# Altium PCB PCB1.PcbDoc (part 3 of 3)
Units mil, origin at the board's own origin, x right, y up, seen from the top; angles counter-clockwise.
Board outline 3550 x 3015 mil, 5 copper layers (Top Layer, GND, Layer 1, Layer 2, Bottom Layer), stack 19.334 mil thick; 291 components, 192 nets, 917 pads, 203 vias.
Unrouted connection lines stored in the file: 51.
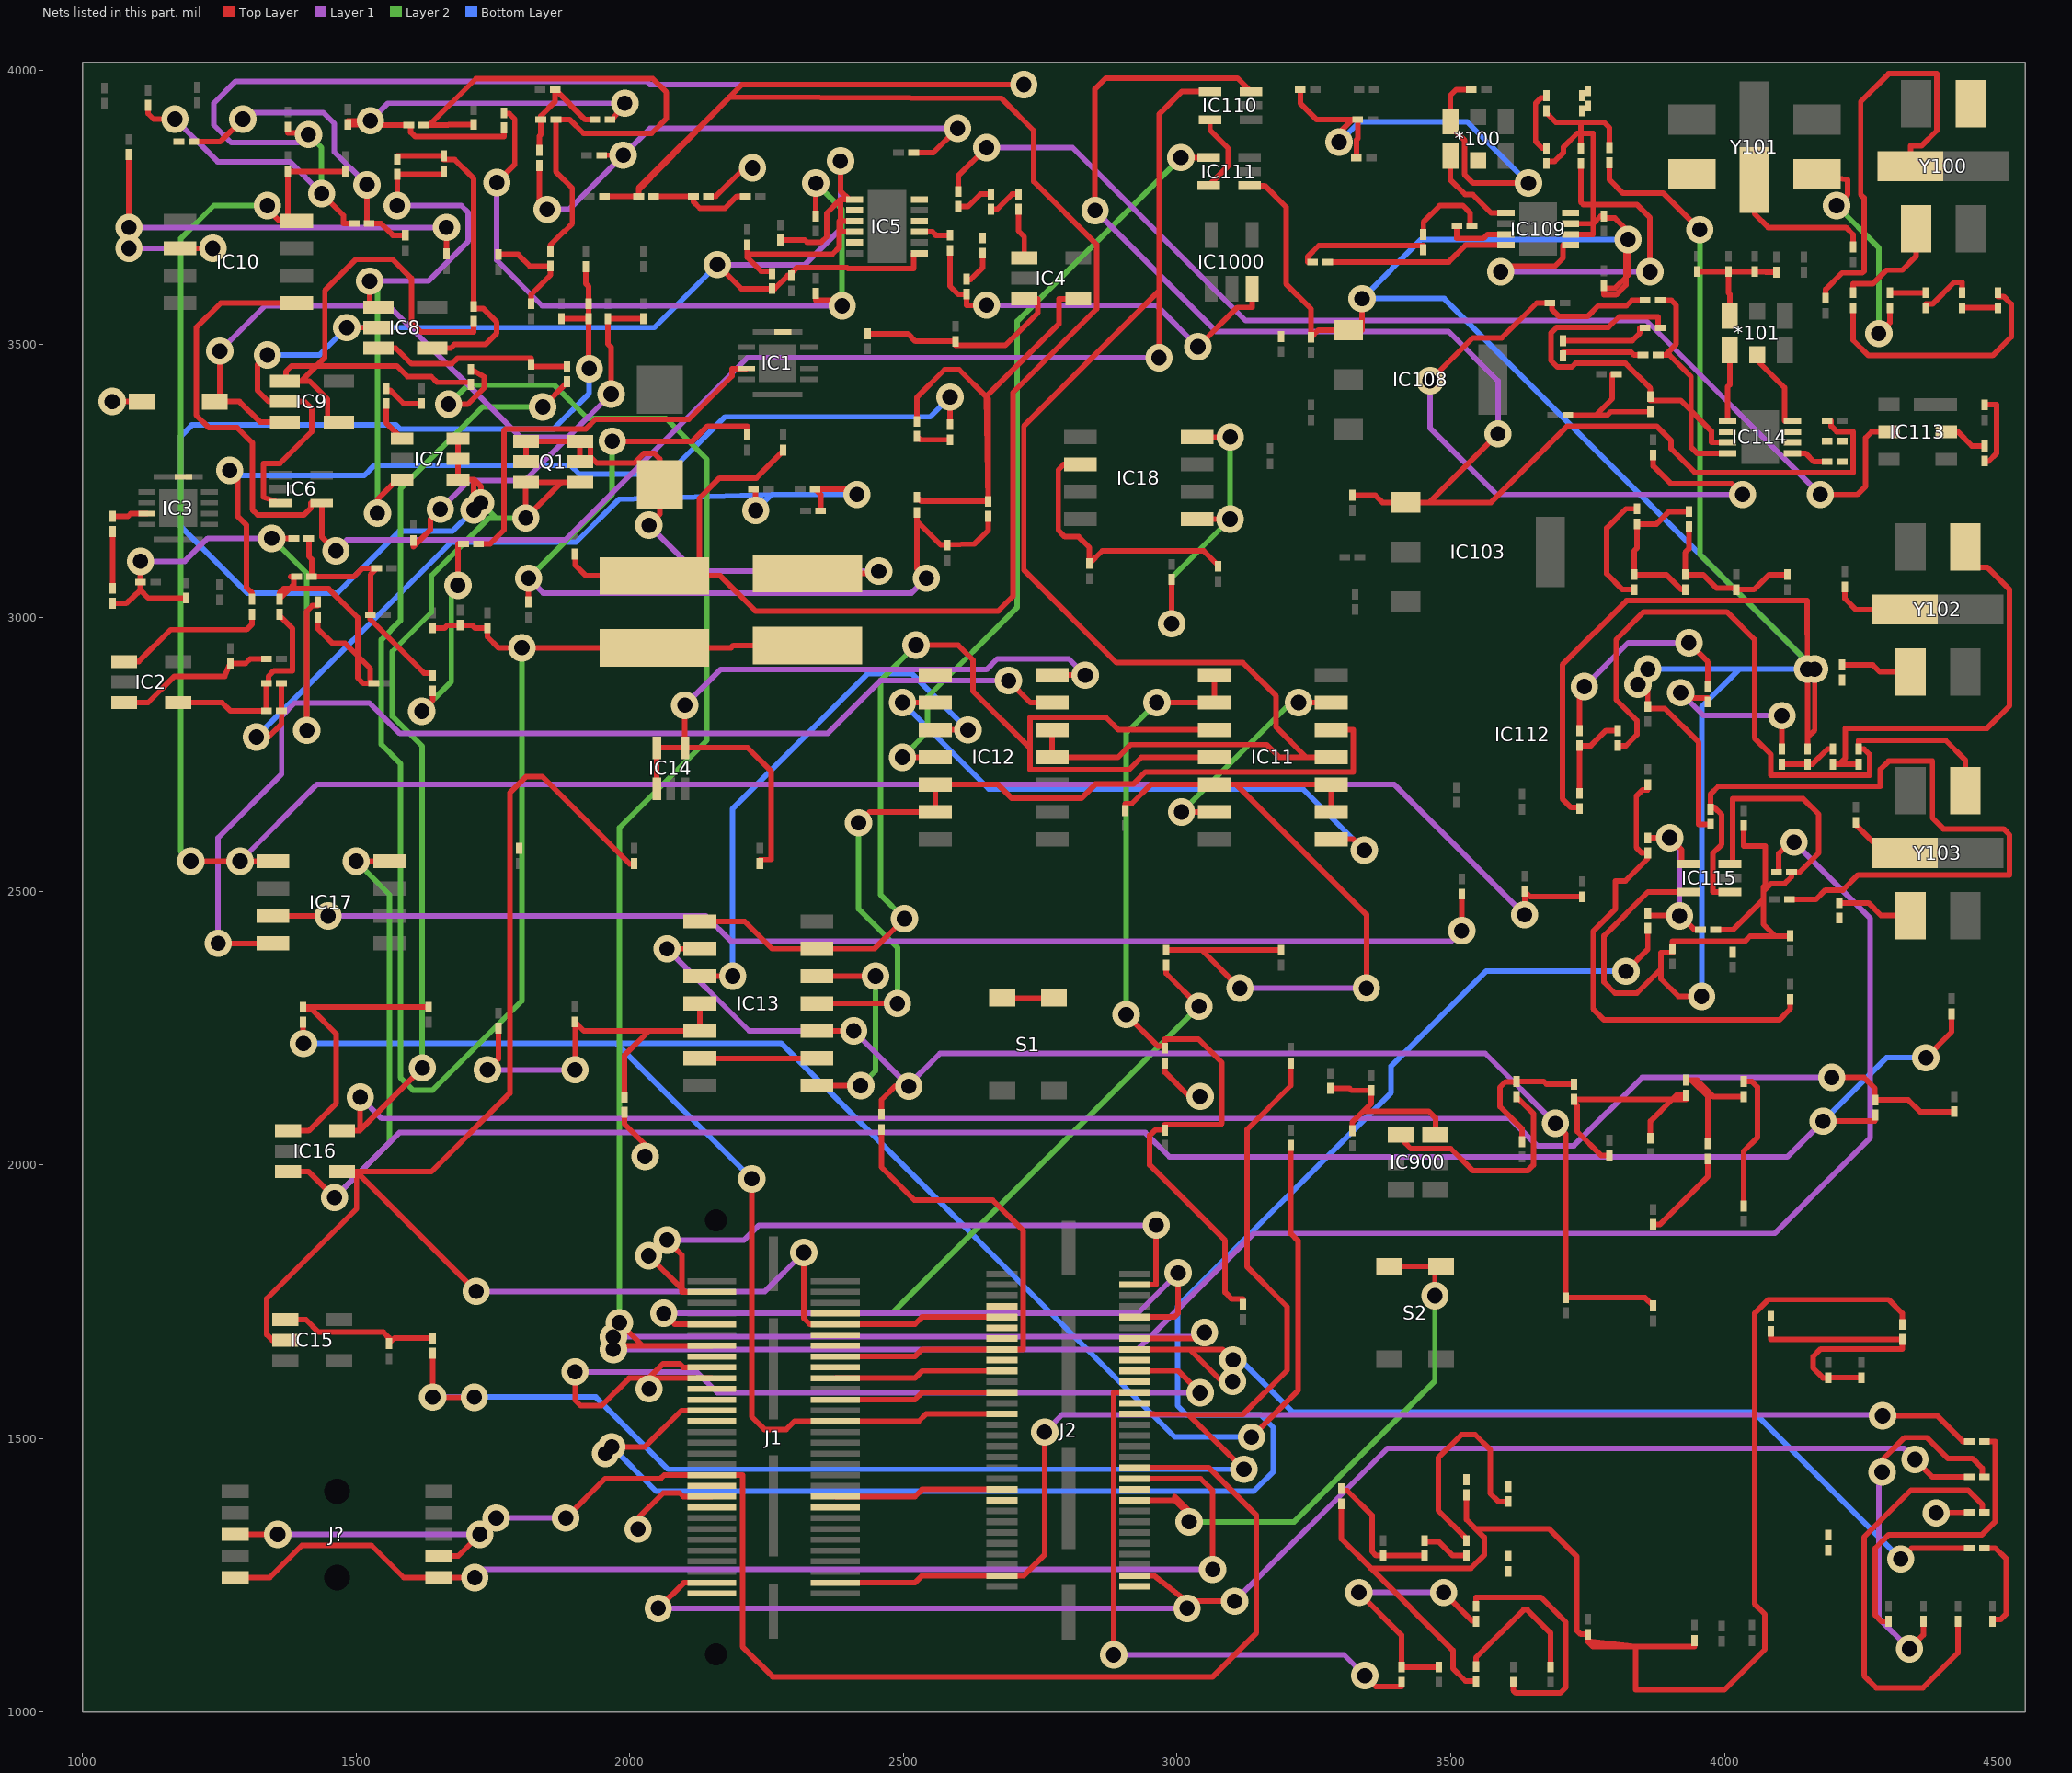
[diagram p5: the nets of this part, all layers, seen from the top]

## Via types
v1: diameter 50, hole 28, Top Layer to Bottom Layer, 203 vias

## Nets (pads, with @x,y where several pads share a name; then routed paths per layer and width w, separated by ;. In a path a pad name is that pad's centre, name@x,y a point inside that pad or via, vN(x,y) a via of type N, cw(c..) or ccw(c..) an arc to the next point about the centre after c; other vN are vias at no path point) (continued)
3.0V_1: C144.2 C152.2 C158.2 C161.2 C164.2 C171.2 C174.1 IC108.1 IC109.7 IC111.1 IC112.7 IC112.8 IC115.5 L123.1 L126.2 L131.1 R141.1 | length 7350.2
  Top Layer w10: IC111.1@3132.4,3789.41 3160,3789.41 3199,3750.41 3199,3610 3245,3564 C144.2@3245,3512.56 3257.99,3525.55 IC108.1@3313.11,3525.55 3338,3525.55 v1(3338,3583) ; IC109.7@3719.06,3719.84 3760,3719.84 3773.94,3733.78 3776.22,3733.78 C152.2@3780,3730 ; L131.1@3735,2651.22 3735,2653 3720,2653 3704,2669 3704,2914 3821.22,3031.22 4151.45,3031.22 4151.55,2906 L126.2@4151.67,2760 4151.67,2781 ; C158.2@3780,3606.22 C158.2@3780,3602 ; C152.2@3780,3733.78 C152.2@3780,3730 ; L123.1@3790,3831.22 3790,3800 3814,3776 3888,3776 v1(3955,3709) ; v1(3824,3691) 3824,3626 3820,3622 ; v1(3842,2878.12) 3860,2860.12 ; v1(3860,2906) 3860,2860.12 ; IC115.5@3935.2,2498.82 3860.1,2498.82 3780,2418.71 3780,2334 3800,2314 3840,2314 3884,2358 ; v1(3958.38,2308) 3916,2308 3884,2340 3884,2358 ; R141.1@3975,2622.44 3953,2622.44 3953,2772 3891,2834 3860,2834 C161.2@3860,2837.56 3860,2860.12 ; C174.1@4035,2620 4035,2583 4075,2583 4075,2512 4071,2508 4071,2440 4093,2418 ; C171.2@4120,2418.78 4120,2418 4093,2418 ; v1(4151.67,2906) 4151.67,2781 ; v1(4165,2906) 4165,2794.33 4151.67,2781 ; C158.2@3780,3602 3800,3602 3820,3622 ; C158.2@3780,3602 3780,3589.82 3801.82,3589.82 3820,3608 3820,3622 ; C152.2@3780,3730 3800,3730 3820,3710 3820,3622 ; 3884,2358 3884,2388 3905,2388 C164.2@3905,2395 3905,2409 4038,2409 4047,2418 4093,2418
  Layer 2 w10: v1(3955,3709) 3955,3116 v1(4165,2906)
  Bottom Layer w10: v1(3824,3691) 3446,3691 v1(3338,3583) 3488,3583 v1(4165,2906) ; v1(3860,2906) 4027,2906 ; v1(3958.38,2308) 3958.38,2837.38 4027,2906 ; v1(4151.67,2906) 4027,2906
3.0V_2: C142.2 C169.2 IC103.1 IC110.3 IC114.2 IC114.7 | length 2823.5
  Top Layer w10: v1(2850,3744) 2850,3966 2870,3986 3110.18,3986 IC110.3@3135,3961.18 ; C142.2@3320,3223.78 3362,3223.78 3375.23,3210.55 IC103.1@3418.11,3210.55 3460.76,3210.55 ; v1(3586.2,3336) 3460.76,3210.55 ; C169.2@4187.44,3360 4195,3360 4195,3350 4205,3340 4235,3340 4235,3265 3946.48,3265 3902.79,3308.69 3902.79,3323.21 3876,3350 3713,3350 3573.55,3210.55 3460.76,3210.55
  Layer 1 w10: v1(2850,3744) 3071,3523 3495.87,3523 3586.2,3432.67 v1(3586.2,3336)
3.0V_3: C211.1 C213.1 L202.2 R206.1 R208.1 R222.1 | length 2731.6
  Top Layer w10: R208.1@3300,1381.22 3300,1317.08 3354,1263.08 ; R206.1@3528.75,1397.44 3528.75,1352 3545.75,1335 ; R222.1@3546,1056.22 3546,1057 3527,1057 3504,1080 3504,1113.08 3354,1263.08 ; C213.1@3945,1131.22 3945,1120 3838,1120 ; L202.2@4325,1708.78 4325,1729 4300,1754 4080,1754 4055,1729 4055,1198 4074,1179 4074,1115 4000,1041 3838,1041 3838,1120 ; 3354,1263.08 3537.08,1263.08 3561,1287 3561,1319.75 3545.75,1335 ; 3545.75,1335 3680,1335 3730,1285 3730,1150 3737.56,1142.44 C211.1@3750,1142.44 3750,1130 ; 3750,1130 3838,1120 ; 3750,1130 3760,1120 3838,1120
3.0V_log: C59.1 IC12.14 IC14.1 IC14.4 IC14.5 | length 1407.2
  Top Layer w10: IC14.1@2049.41,2687.6 IC14.5@2049.41,2762.4 IC14.4@2100.59,2762.4 ; v1(2100.59,2840) IC14.4@2100.59,2762.4 ; C59.1@2237.76,2550.87 2237.76,2558 2258,2558 2258,2720 2215.6,2762.4 IC14.4@2100.59,2762.4 ; IC12.14@2771.77,2895 v1(2832,2895)
  Layer 1 w10: v1(2100.59,2840) 2165.59,2905 2651.75,2905 2671.75,2925 2802,2925 v1(2832,2895)
-Z_CIC: J1.24 J2.24 J?.4 J?.5 | length 2844.4
  Top Layer w10: J?.5@1278.78,1325 v1(1357,1325) ; J?.4@1651.22,1285.63 1686.63,1285.63 v1(1726,1325) v1(1756,1355) ; v1(1883,1355) 1955,1427 2056.57,1427 2063,1433.43 J1.24@2150,1433.43 2206,1433.43 2206,1120 2261,1065 3065,1065 3145,1145 3145,1360 3058.43,1446.57 J2.24@2922.99,1446.57
  Layer 1 w10: v1(1357,1325) v1(1726,1325) ; v1(1756,1355) v1(1883,1355)
-Z_DEPLOY_SW_1: J1.17 J2.17 S1.1 S1.2 | length 94.5
  Top Layer w10: S1.1@2680.51,2305 S1.2@2775,2305
-Z_DEPLOY_SW_2: J1.18 J2.18 S2.1 S2.2 | length 1083
  Top Layer w10: J2.18@2922.99,1387.52 2995,1387.52 ; v1(3021.54,1348.15) v1@3022,1348.15 ; v1(3022,1348) v1@3022,1348.15 ; S2.1@3387.76,1814.65 S2.2@3471,1814.65 ; v1(3471,1761) S2.2@3471,1814.65 ; S2.2@3482.24,1814.65 S2.2@3471,1814.65 ; 2995,1387.52 3001.48,1387.52 2995.5,1393.5 2995.5,1394.19 3041.54,1348.15 v1@3022,1348.15 ; 2995,1387.52 3022,1360.52 v1@3022,1348.15
  Layer 2 w10: v1(3022,1348) 3214,1348 3471,1605 v1(3471,1761)
-Z_THERMISTOR: J1.22 J2.22 J?.1 J?.2 | length 2136
  Top Layer w10: J?.1@1278.78,1246.26 1342.26,1246.26 1401,1305 1528.26,1305 1587,1246.26 J?.2@1651.22,1246.26 v1(1717,1246.26) ; J2.22@2922.99,1426.89 3043,1426.89 3065,1404.89 v1(3065,1261)
  Layer 1 w10: v1(1717,1246.26) 1731.74,1261 v1(3065,1261)
CMD_H/W_Bit_0: J1.40 J2.40
CMD_H/W_Bit_1: J1.41 J2.41 | length 309.9
  Top Layer w10: J1.41@2375.59,1610.59 2521,1610.59 2534.15,1623.74 J2.41@2680,1623.74
CMD_H/W_Bit_2: J1.42 J2.42 | length 1620.1
  Top Layer w10: v1(1900,1622) 1900,1570.41 1910.41,1560 1948.41,1560 1999,1610.59 J1.42@2150,1610.59 ; J2.42@2922.99,1623.74 3002.26,1623.74 v1(3042,1584)
  Layer 1 w10: v1(1900,1622) 2122,1622 2160,1584 v1(3042,1584)
CMD_H/W_Bit_3: J1.43 J2.43 R30.1 | length 98.9
  Top Layer w10: R30.1@2977.76,2185.87 2977.76,2169.55 3022,2125.31 v1(3042,2125.31)
CMD_H/W_BITS_STROBE: J1.44 J2.44 | length 169
  Top Layer w10: v1(2035.32,1590.91) 2050,1590.91 2035.32,1605.59 2035.32,1610.91 2061.35,1636.94 2091.15,1636.94 2097.82,1630.28 J1.44@2150,1630.28
CMD_SERIAL_DATA: J1.49 J2.49
I2C2_SCL: J1.19 J2.19 | length 309.9
  Top Layer w10: J1.19@2375.59,1394.06 2521,1394.06 2534.15,1407.2 J2.19@2680,1407.2
I2C2_SDA: J1.20 J2.20 | length 176.5
  Top Layer w10: v1(2015.32,1334.69) 2015.32,1354.69 2061.35,1400.72 2091.15,1400.72 2097.82,1394.06 J1.20@2150,1394.06
ICR_RSSI: J1.37 J2.37 | length 309.9
  Top Layer w10: J1.37@2375.59,1571.22 2521,1571.22 2534.15,1584.37 J2.37@2680,1584.37
IF+: IC112.1 R129.1 R130.1 | length 66
  Top Layer w10: R130.1@4434,3566.22 R129.1@4500,3566.22
IF-: IC112.2 R130.2 R131.1 | length 108.6
  Top Layer w10: R131.1@4368,3566.22 4368,3573 4380,3573 4420,3613 4434,3613 R130.2@4434,3593.78
LT: IC12.4 IC111.4 | length 1417.8
  Top Layer w10: v1(2498,2745) IC12.4@2558.23,2745 ; v1(3007,3841) 3007.41,3840.59 IC111.4@3057.6,3840.59
  Layer 2 w10: v1(2498,2745) 2544,2791 2544,2855 2708,3019 2708,3542 v1(3007,3841)
MODEM_CXR_DET: J1.53 J2.53
Net*100_1: *100.1 C140.2 R126.2 R127.2 R128.2 | length 993
  Top Layer w10: R128.2@3225,3965 3225,3940 3255,3910 3320,3910 ; v1(3296,3869) 3296,3886 3320,3910 ; R127.2@3327.44,3840 3327.44,3873 3330,3875.56 R126.2@3330,3910 3320,3910 ; C140.2@3537.44,3965 3510,3965 3499.61,3954.61 *100.1@3499.61,3906.73 3499.61,3898 3525,3872.61 3525,3810 3541,3794 v1(3642,3794)
  Bottom Layer w10: v1(3296,3869) 3333,3906 3530,3906 v1(3642,3794)
Net*100_4: *100.4 IC109.1 | length 170.2
  Top Layer w10: *100.4@3499.61,3843.72 3499.61,3799.92 3526.34,3773.18 3540,3773.18 3573.66,3739.53 IC109.1@3600.94,3739.53
Net*100_5: *100.5 IC109.8
Net*101_1: *101.1 C162.2 R133.2 R134.2 R135.2 | length 227.1
  Top Layer w10: R133.2@3950,3632.44 R134.2@4007.5,3632.44 ; *101.1@4009.61,3551.73 4009.61,3591 4007.5,3593.11 R134.2@4007.5,3632.44 ; C162.2@4095,3631.22 4075.22,3631.22 4074,3632.44 R135.2@4055,3632.44 R134.2@4007.5,3632.44
Net*101_4: *101.4 IC114.1 | length 130.7
  Top Layer w10: IC114.1@4005.94,3359.53 4005.94,3422 4009.61,3425.66 *101.4@4009.61,3488.72
Net*101_5: *101.5 IC114.8 | length 155.7
  Top Layer w10: *101.5@4060,3480.46 4060,3470 4110,3420 4110,3359.53 IC114.8@4124.06,3359.53
NetC1_2: C1.2 L1.1 R1.2 | length 191.7
  Top Layer w10: R1.2@2043.78,3770 L1.1@2116,3770 ; L1.1@2116.22,3770 L1.1@2116,3770 ; C1.2@2211.22,3770 2196,3770 2174,3748 2128,3748 2116,3760 L1.1@2116,3770
NetC2_2: C2.2 C3.2 L4.2 R2.1 R3.1 | length 1615.4
  Top Layer w10: v1(1318,2782) 1340,2782 1364,2806 1364,2830 L4.2@1363.78,2830 R3.1@1363.78,2880 ; R2.1@2226.22,3235 2230,3235 v1(2230,3196) ; C2.2@2348.78,3195 2348.78,3225 C3.2@2338.78,3235 2405,3235 v1(2415,3225)
  Bottom Layer w10: v1(1318,2782) 1674,3138 1902,3138 1980,3216 2229.1,3224.04 2259,3225 ; v1(2230,3196) 2259,3225 ; v1(2415,3225) 2259,3225
NetC4_2: C4.2 C12.2 L3.2 | length 1035
  Top Layer w10: C12.2@1835,3826.22 1835,3760 v1(1849,3746) ; C4.2@1948.78,3845 v1(1988,3845) ; L3.2@2518.78,3850 2555,3850 v1(2599,3894)
  Layer 1 w10: v1(1849,3746) 1889,3746 v1(1988,3845) 2037,3894 v1(2599,3894)
NetC6_2: C6.2 C12.1 L5.1 R6.1 | length 218.4
  Top Layer w10: C12.1@1835,3853.78 1835,3880 1837.44,3882.44 L5.1@1837.44,3910 1837.44,3916.72 1863.78,3943.06 C6.2@1863.78,3965 1918.78,3910 R6.1@1936.22,3910
NetC8_2: C8.2 C13.2 L6.1 L11.1 | length 560.2
  Top Layer w10: C13.2@1360,3033.78 C13.2@1360,3034.34 ; 1380,3075 L6.1@1386,3075 ; L6.1@1391.22,3075 L6.1@1386,3075 ; L11.1@1430,3001.22 1430,2980 1457,2953 1480,2953 1503,2930 ; C8.2@1532.44,2880 C8.2@1526,2880 ; C13.2@1360,3034.34 1378.66,3053 ; C13.2@1360,3034.34 1360,3045 1368,3053 1378.66,3053 ; 1378.66,3053 1450,3053 1503,3000 1503,2930 ; 1378.66,3053 1386,3060.34 L6.1@1386,3075 ; 1503,2930 1503,2890 1513,2880 C8.2@1526,2880 ; 1503,2930 1526,2907 C8.2@1526,2880
NetC9_2: C9.2 C11.2 L6.2 R4.1 R7.1 | length 454.6
  Top Layer w10: R7.1@1413.78,3145 1413.78,3112 1418.78,3107 L6.2@1418.78,3075 1496,3075 1511,3090 R4.1@1537.44,3090 1526.22,3078.78 C9.2@1526.22,3005 1526,3005 1526,2997 1624,2899 1640,2899 C11.2@1640,2893.78
NetC11_1: C11.1 L2.1 | length 389.1
  Top Layer w10: v1(1620,2829) 1640,2849 C11.1@1640,2866.22 ; v1(1686,3059) 1686,3135 L2.1@1696.22,3135
  Layer 2 w10: v1(1620,2829) 1674,2883 1674,3047 v1(1686,3059)
NetC13_1: C13.1 IC2.4 L4.1 R3.2 | length 395.5
  Top Layer w10: IC2.4@1175,2845 1255,2845 1270,2830 L4.1@1336.22,2830 R3.2@1336.22,2880 1340,2880 1340,2893 1350,2903 1384,2903 1384,2980 1360,3004 C13.1@1360,3006.22
NetC15_2: C15.2 L8.1 R8.2 | length 573.1
  Top Layer w10: L8.1@1203.78,3870 1252,3870 v1(1293,3911) ; v1(1520,3791) 1520,3720 R8.2@1523.78,3720 1546,3720 1567.22,3698.78 C15.2@1590,3698.78
  Layer 1 w10: v1(1293,3911) 1305,3923 1440,3923 1460.26,3902.74 1460.26,3850.74 v1(1520,3791)
NetC16_2: C16.2 L10.2 R10.2 | length 187
  Top Layer w10: C16.2@1760,3663.78 1796,3663.78 1817.34,3642.44 L10.2@1855,3642.44 1855,3626 1820,3591 R10.2@1820,3573.78
NetC17_1: C17.1 C20.1 L9.1 R6.2 | length 886.3
  Top Layer w10: v1(1526,3908) 1485,3908 C20.1@1485,3901.22 1540,3901.22 1541.22,3900 L9.1@1596.22,3900 1600,3900 1600,3887 1608.3,3878.7 1770,3878.7 C17.1@1770,3895 ; R6.2@1963.78,3910 1968,3910 v1(1991,3940)
  Layer 1 w10: v1(1526,3908) 1558,3940 v1(1991,3940)
NetC17_2: C17.2 C27.1 L14.2 | length 1331.4
  Top Layer w10: v1(1757,3795) 1790,3828 1790,3911 1780,3921 1770,3921 C17.2@1770,3922.56 ; C27.1@2340,3592.44 2340,3580 2378,3580 v1(2388,3570) ; L14.2@2340,3733.78 v1(2340,3794)
  Layer 1 w10: v1(1757,3795) 1757,3653 1840,3570 v1(2388,3570)
  Layer 2 w10: v1(2340,3794) 2388,3746 v1(2388,3570)
NetC18_1: C18.1 IC2.3 R5.2 | length 298.4
  Top Layer w10: IC2.3@1076.57,2845 1120,2845 1168,2893 1260,2893 C18.1@1270,2916.22 1298,2916.22 1306.78,2925 R5.2@1336.22,2925
NetC21_1: C21.1 L5.2 L9.2 L10.1 | length 1111.4
  Top Layer w10: L9.2@1623.78,3900 1634,3900 ; C21.1@1715,3901.22 1669.22,3901.22 1668,3900 1634,3900 ; L10.1@1855,3670 1855,3681 1880,3706 1881,3706 1895,3720 1895,3785 1865,3815 L5.2@1865,3910 1890.49,3910 1915.49,3885 2040,3885 2067,3912 2067,3960 2042,3985 1719,3985 1634,3900
NetC23_1: C23.1 C25.1 L11.2 R7.2 R9.1 | length 1127.9
  Top Layer w10: C25.1@1055,3026.22 1055,3026 1080,3026 1106,3050 ; v1(1106,3103) R9.1@1106,3065 ; R9.1@1106.22,3065 R9.1@1106,3065 ; C23.1@1190,3036.22 1190,3036 1120,3036 1106,3050 ; v1(1346,3145) R7.2@1386.22,3145 ; v1(1410,2794) 1410,3012 1420,3022 1430,3022 L11.2@1430,3028.78 ; 1106,3050 R9.1@1106,3065
  Layer 1 w10: v1(1106,3103) 1187,3103 1229,3145 v1(1346,3145)
  Layer 2 w10: v1(1346,3145) 1410,3081 v1(1410,2794)
NetC25_2: C25.2 L13.1 | length 103.7
  Top Layer w10: C25.2@1055,3053.78 L13.1@1055,3157.44
NetC28_2: C28.2 C29.2 L16.2 R13.2 R14.1 | length 1692.1
  Top Layer w10: C28.2@1815,3028.78 v1(1815,3072) ; v1(1968,3322.32) 2114.55,3322.32 2142.23,3350 2215,3350 C29.2@2215,3333.78 ; R14.1@2525,3192.44 2525,3176 ; v1(2542,3072) 2525,3089 2525,3176 ; R13.2@2580,3132.56 R13.2@2580,3133 ; L16.2@2655,3185 2655,3160 2630,3135 R13.2@2580,3133 ; 2525,3176 2568,3133 R13.2@2580,3133
  Layer 1 w10: v1(1815,3072) 1842,3045 2515,3045 v1(2542,3072)
  Layer 2 w10: v1(1815,3072) 1968,3225 v1(1968,3322.32)
NetC30_1: C30.1 IC4.3 R15.1 | length 399.3
  Top Layer w10: R15.1@2435,3518.78 2508,3518.78 2521.78,3505 C30.1@2595,3505 2595,3497.54 2686.1,3497.54 2745.96,3557.4 2745.96,3582.6 IC4.3@2720.79,3582.6
NetC31_1: C31.1 L15.1 | length 62.6
  Top Layer w10: C31.1@2525,3331.22 2531.22,3325 L15.1@2585,3325
NetC31_2: C31.2 IC4.4 L16.1 R14.2 | length 997.8
  Top Layer w10: R14.2@2525,3220 2532.44,3212.56 L16.1@2655,3212.56 ; C31.2@2525,3358.78 2525,3403 2575.12,3453.12 2601.88,3453.12 2651.14,3403.86 ; IC4.4@2819.21,3582.6 2784,3582.6 2784,3536.73 2651.14,3403.86 ; 2651.14,3403.86 2655,3400 L16.1@2655,3212.56 ; 2651.14,3403.86 L16.1@2655,3212.56
NetC32_1: C32.1 L17.2 | length 69.3
  Top Layer w10: C32.1@2600,3751.22 2618,3751.22 2640.56,3773.78 L17.2@2660,3773.78
NetC32_2: C32.2 IC113.5 | length 2112.5
  Top Layer w10: C32.2@2600,3778.78 2600,3807 v1(2652,3859) ; v1(4175,3225) 4243,3225 4258,3240 4258,3328.72 4269,3339.72 IC113.5@4300.67,3339.72
  Layer 1 w10: v1(2652,3859) 2809,3859 3125,3543 3857,3543 v1(4175,3225)
NetC34_1: C34.1 C43.2 IC5.1 IC5.4 IC5.7 IC5.10 IC6.3 IC8.2 IC9.2 R17.1 | length 2550.2
  Top Layer w10: v1(1338,3480) 1320,3462 1320,3415 1340,3395 IC9.2@1370,3395 1406,3395 1419,3382 1419,3340 1361,3282 1331,3282 1331,3220 IC6.3@1362.6,3209.41 ; v1(1483,3530) IC8.2@1540.79,3530 ; v1(2160,3645) 2204,3601 2260,3601 R17.1@2260,3601.22 2265,3601.22 2288.78,3625 C43.2@2295,3625 2295,3628.94 2306.06,3640 2397,3640 2399,3638 2519,3638 2519,3665.79 IC5.7@2529.06,3665.79 ; C34.1@2275,3690 2320,3690 2324,3686 2350,3686 2360,3696 2360,3739.21 2385,3764.21 ; v1(2385,3834.34) 2385,3779.79 IC5.1@2400.57,3764.21 ; IC5.4@2410.94,3705.16 2385,3705.16 2385,3764.21 ; IC5.1@2410.94,3764.21 IC5.1@2400.57,3764.21 ; 2385,3764.21 IC5.1@2400.57,3764.21
  Layer 1 w10: v1(2160,3645) 2320,3645 2385,3710 v1(2385,3834.34)
  Bottom Layer w10: v1(1338,3480) 1433,3480 v1(1483,3530) 2045,3530 v1(2160,3645)
NetC38_1: C38.1 C39.1 C41.1 L18.2 L19.1 R20.1 | length 3149.9
  Top Layer w10: C41.1@1640,2981.22 1662,2981.22 1667,2986.22 C39.1@1690,2986.22 1712,2986.22 1717,2981.22 C38.1@1740,2981.22 1740,2965 1760,2945 v1(1803,2945) L19.1@2045,2945 2185,2945 2189.25,2949.25 L18.2@2325,2949.25 ; v1(1841,3385) 1885,3429 R20.1@1885,3431.22
  Layer 2 w10: v1(1803,2945) 1803,2300 1640,2137 1604,2137 1581,2160 1581,2733.47 1546.09,2768.38 1546.09,2959.78 1581,2994.69 1581,3235 1731,3385 v1(1841,3385)
NetC44_1: C44.1 C45.1 D?.2 IC9.3 R23.1 | length 1709.7
  Top Layer w10: D?.2@1241.93,3395 D?.2@1251,3395 ; v1(1251,3487) D?.2@1251,3395 ; IC9.3@1370,3357.6 1324.4,3357.6 1287,3395 D?.2@1251,3395 ; C44.1@1605,3141.22 1605,3130 1636,3161 1636,3180 v1(1654,3198) ; v1(1966,3408.56) 1966,3494 1960,3500 C45.1@1960,3546.22 R23.1@2025,3546.22
  Layer 1 w10: v1(1251,3487) 1334,3570 1560,3570 1800,3330 1887.44,3330 ; v1(1654,3198) 1706.62,3250.62 1808.05,3250.62 1887.44,3330 ; v1(1966,3408.56) 1887.44,3330
NetC50_2: C50.2 R26.1 | length 78.9
  Top Layer w10: R26.1@1555,3418.78 1555,3415 1563,3415 1587,3391 1620,3391 C50.2@1620,3391.22
NetC51_1: C51.1 IC7.3 IC8.1 R27.2 | length 1132
  Top Layer w10: v1(1525,3615) 1525,3567.4 IC8.1@1540.79,3567.4 ; v1(1539,3191) 1539,3215.6 1576,3252.6 IC7.3@1583.82,3252.6 ; v1(1575,3753) R27.2@1575,3810 1660,3810 C51.1@1660,3816.22
  Layer 1 w10: v1(1525,3615) 1632,3615 1705,3688 1705,3740 1692,3753 v1(1575,3753)
  Layer 2 w10: v1(1525,3615) 1539,3615 v1(1539,3191)
NetC51_2: C51.2 IC8.4 R22.2 R27.1 | length 606.4
  Top Layer w10: R27.1@1575,3837.56 1575,3844 1660,3844 C51.2@1660,3843.78 1660,3837 1680,3837 1715,3802 R22.2@1715,3568.78 1715,3565 1732,3565 1757,3540 1757,3520 1736,3499 1679.4,3499 1673,3492.6 IC8.4@1639.21,3492.6
NetC54_2: C54.2 IC11.1 IC11.2 R29.2 R30.2 | length 1631.5
  Top Layer w10: v1(2907,2275) 2965,2217 R30.2@2977.76,2217 ; v1(2963,2845) IC11.2@3068.23,2845 IC11.1@3068.23,2895 ; R29.2@2977.76,2063.43 R29.2@2977.76,2064 ; R30.2@2977.76,2213.43 R30.2@2977.76,2217 ; C54.2@3120,1745 3120,1754.9 3100,1754.9 3087.76,1767.14 3087.76,1862.24 2950,2000 2950,2054 2960,2064 R29.2@2977.76,2064 ; R29.2@2977.76,2064 2977.76,2073.9 3080,2073.9 3082,2075.9 3082,2187 3039,2230 2977.76,2230 R30.2@2977.76,2217
  Layer 2 w10: v1(2907,2275) 2907,2789 v1(2963,2845)
NetC55_2: C55.2 IC11.5 IC11.9 IC11.10 R31.2 R32.2 | length 1463.5
  Top Layer w10: R32.2@2905,2647.56 2905,2660 2917,2660 2952,2695 IC11.5@3068.23,2695 3108.29,2695 ; R31.2@2980,2392.56 3045.44,2392.56 ; v1(3115,2323) 3045.44,2392.56 ; C55.2@3190,2392.56 3045.44,2392.56 ; IC11.9@3281.77,2645 IC11.10@3281.77,2695 3108.29,2695 ; v1(3346,2323) 3346,2457.29 3108.29,2695
  Layer 1 w10: v1(3115,2323) v1(3346,2323)
NetC56_2: C56.2 IC13.2 IC13.10 R33.2 R34.2 | length 2514.6
  Top Layer w10: v1(2068,2395) IC13.2@2128.23,2395 ; IC13.10@2341.77,2245 v1(2409,2245) ; R34.2@2460,2092.56 2460,2119 2485,2144 v1(2510,2144) v1@2508.5,2145.5 ; v1(3691,2076) 3710,2057 R33.2@3710,1757.56 3855,1757.56 C56.2@3870,1742.56
  Layer 1 w10: v1(2068,2395) 2218,2245 v1(2409,2245) v1@2508.5,2145.5 ; v1(2510,2144) v1@2508.5,2145.5 ; v1(3691,2076) 3563.06,2203.94 2566.94,2203.94 v1@2508.5,2145.5
NetC57_1: C57.1 IC13.4 IC13.5 R35.2 R36.1 | length 756.3
  Top Layer w10: v1(1740,2174) 1760,2194 C57.1@1760,2250 ; v1(1900,2174) R36.1@1900,2261.22 1916.22,2245 2035,2245 ; R35.2@1990,2123.78 1990,2200 2035,2245 ; IC13.4@2128.23,2295 IC13.5@2128.23,2245 2035,2245
  Layer 1 w10: v1(1740,2174) v1(1900,2174)
NetC58_2: C58.2 IC15.1 R37.2 | length 297.7
  Top Layer w10: IC15.1@1370.79,1717.4 1408.55,1717.4 1431.39,1694.56 1550,1694.56 1560,1684.56 C58.2@1560,1673.78 1570,1683.78 R37.2@1640,1683.78
NetC62_2: C62.2 IC16.1 R38.2 | length 549.1
  Top Layer w10: IC16.1@1375.79,2062.4 1413.55,2062.4 1463.24,2112.09 1463.24,2240 1419.24,2284 1402.76,2284 R38.2@1402.76,2288.43 C62.2@1632.76,2288.43
NetC65_1: C65.1 IC16.3 IC17.8 R39.1 | length 4102.8
  Top Layer w10: IC16.3@1375.79,1987.6 1413.55,1987.6 v1(1460.64,1940.51) ; v1(1500,2555) IC17.8@1561.77,2555 ; v1(4180.04,2080) 4275,2080 R39.1@4275,2091.22 ; v1(4368,2196) 4415,2243 C65.1@4415,2276.22
  Layer 1 w10: v1(1460.64,1940.51) 1579.12,2059 2942,2059 2985.84,2015.16 4115.19,2015.16 v1(4180.04,2080)
  Layer 2 w10: v1(1460.64,1940.51) 1561,2040.88 1561,2494 v1(1500,2555)
  Bottom Layer w10: v1(4180.04,2080) 4296.04,2196 v1(4368,2196)
NetC68_1: C68.1 IC18.5 IC18.8 | length 586.7
  Top Layer w10: v1(2990,2989) C68.1@2990,3070 ; IC18.5@3036.77,3180 v1(3096.81,3180) v1(3097,3180) ; IC18.8@3036.77,3330 v1(3097,3330)
  Layer 2 w10: v1(2990,2989) 2990,3073.19 v1(3096.81,3180) ; v1(3097,3180) v1(3097,3330)
NetC141_1: C141.1 R129.2 | length 470.5
  Top Layer w10: C141.1@4235,3566.22 4235,3507 4263,3479 4490,3479 4524,3513 4524,3573 4510,3587 4500,3587 R129.2@4500,3593.78
NetC141_2: C141.2 Y100.3 | length 202.8
  Top Layer w10: C141.2@4235,3593.78 4235,3610 4270.93,3610 4295.93,3635 4325,3635 4350,3660 Y100.3@4350,3710.83
NetC143_1: C143.1 C150.1 L117.2 L119.2 | length 301.5
  Top Layer w10: C143.1@3935,3166.22 3935,3125.67 3928.33,3119 L117.2@3928.33,3078.78 3961,3078.78 3985.44,3054.34 4021.67,3054.34 C150.1@4021.67,3051.22 4054,3051.22 4081.56,3078.78 L119.2@4115,3078.78
NetC143_2: C143.2 C149.1 L117.1 L118.2 | length 303.6
  Top Layer w10: L117.1@3928.33,3051.22 3921.42,3051.22 3893.86,3078.78 L118.2@3835,3078.78 3835,3122 3840,3127 C149.1@3840,3171.22 3876,3171.22 3898.56,3193.78 C143.2@3935,3193.78
NetC145_2: C145.2 Y100.2 | length 773.1
  Top Layer w10: C145.2@4185,3583.78 4185,3600 4215,3630 4252,3630 4255,3633 4255,3767 4249,3773 4249,3943 4300,3994 4388,3994 4388,3890 4360,3862 4339.96,3862 Y100.2@4339.96,3825
NetC149_2: C149.2 L118.1 | length 215.6
  Top Layer w10: L118.1@3835,3051.22 3813.78,3051.22 3785,3080 3785,3164 3820,3199 3840,3199 C149.2@3840,3198.78
NetC151_1: C151.1 Y101.3 | length 433.4
  Top Layer w10: Y101.3@4169.17,3810.04 4224.96,3800 4224.96,3773 v1(4204.96,3753) ; v1(4282,3519) 4302,3539 C151.1@4302,3566.22
  Layer 2 w10: v1(4204.96,3753) 4282,3675.96 v1(4282,3519)
NetC151_2: C151.2 R131.2 | length 66
  Top Layer w10: C151.2@4302,3593.78 R131.2@4368,3593.78
NetC153_1: C153.1 C155.2 L121.2 | length 123.3
  Top Layer w10: L121.2@3675,3857.56 3675,3858 3667,3858 3655,3870 3655,3940 3665,3950 3675,3950 C155.2@3675,3953.78
NetC153_2: C153.2 Y100.6
NetC154_1: C154.1 C155.1 L122.2 L123.2 | length 214.1
  Top Layer w10: C155.1@3675,3926.22 3675,3922 3692,3905 3737.5,3905 ; L122.2@3737.5,3857.56 3737.5,3905 ; L123.2@3790,3858.78 3790,3895 3780,3905 3737.5,3905
NetC154_2: C154.2 Y101.1
NetC156_2: C156.2 Y101.2 | length 280.2
  Top Layer w10: Y101.2@4055,3800 4055,3738 4080,3713 4222,3713 4235,3700 C156.2@4235,3677.56
NetC157_1: C157.1 L120.1 | length 153.4
  Top Layer w10: C157.1@3450,3700 3450,3723 3480,3753 3522,3753 3535,3740 3535,3716.22 L120.1@3538.78,3716.22
NetC157_2: C157.2 L124.2 | length 245.3
  Top Layer w10: L124.2@3247.44,3650 3239,3650 3239,3660 3259,3680 3450,3680 C157.2@3450,3672.44
NetC159_1: C159.1
NetC163_2: C163.2 L125.1 | length 139.2
  Top Layer w10: L125.1@4475,3286.22 4475,3286 4483,3286 4497,3300 4497,3389 4475,3389 C163.2@4475,3388.78
NetC165_2: C165.2 L128.2 R137.2 | length 248.8
  Top Layer w10: R137.2@3713.78,3370 3765,3370 ; C165.2@3802.56,3445 3795,3445 3795,3400 3765,3370 ; L128.2@3865,3376.22 3792.22,3376.22 3786,3370 3765,3370
NetC166_1: C166.1 C168.1 Y102.6 | length 781
  Top Layer w10: C166.1@4198.33,2732.44 4210,2732.44 ; C168.1@4245,2732.44 4210,2732.44 ; Y102.6@4439.96,3129.17 4439.96,3092 4480,3092 4521,3051 4521,2839 4480,2798 4221,2798 4221,2743.44 4210,2732.44
NetC166_2: C166.2 L126.1 L127.1 | length 104.7
  Top Layer w10: L127.1@4105,2732.44 L126.1@4151.67,2732.44 4161,2732.44 4188.56,2760 C166.2@4198.33,2760
NetC167_2: C167.2 Y102.2 | length 139.4
  Top Layer w10: C167.2@4220,3056.22 4220,3035 4240,3015 Y102.2@4329.92,3015
NetC168_2: C168.2 C170.1 Y103.6 | length 1312.6
  Top Layer w10: C170.1@3805,2766.22 3805,2766 3820,2766 3840,2786 3840,2812 3802,2850 3802,2960 3852.67,3010.67 4004.33,3010.67 4055,2960 4055,2780 4085,2750 4085,2712 4265,2712 4265,2750 4255,2760 C168.2@4245,2760 4245,2776.06 4403.9,2776.06 4439.96,2740 Y103.6@4439.96,2684.17
NetC170_2: C170.2 L129.1 L131.2 | length 169.2
  Top Layer w10: L131.2@3735,2678.78 L129.1@3735,2766.22 3756,2766.22 3783.78,2794 3805,2794 C170.2@3805,2793.78
NetC172_1: C172.1 IC112.4 R140.1 R143.1 | length 885.7
  Top Layer w10: R140.1@3860,2695 3860,2685 3850,2685 3839,2674 3839,2580 3849,2570 R143.1@3860,2570 3860,2560 3819,2519 3801,2519 3801,2468 3760,2427 3760,2285 3780,2265 4100,2265 4120,2285 C172.1@4120,2302.44
NetC173_2: C173.2 Y103.2 | length 115.7
  Top Layer w10: C173.2@4240,2626.22 4240,2622 4292,2570 Y103.2@4329.92,2570
NetC175_1: C175.1 L133.1 R142.1 | length 1393.8
  Top Layer w10: v1(3462,3433) 3540,3511 3593,3511 3657,3575 C175.1@3681.22,3575 3685,3575 3685,3563 3697.63,3550.37 3750,3550.37 3769.45,3569.82 3821,3569.82 3831.18,3580 L133.1@3855,3580 ; R142.1@3870,3297.44 3870,3277 3902,3245 4013,3245 v1(4033,3225)
  Layer 1 w10: v1(3462,3433) 3462,3347 3584,3225 v1(4033,3225)
NetC200_1: C200.1 IC900.4 | length 420.8
  Top Layer w10: IC900.4@3408.27,2055.39 3417,2055.39 3417,2040 3427,2030 3500,2030 3540,1990 3641,1990 3651,2000 3651,2094 C200.1@3620,2125
NetC200_2: C200.2 R200.2 R201.2 | length 257.8
  Top Layer w10: R201.2@3630,2042.56 3630,2066.55 3590,2106.55 3590,2142 3600,2152 3620,2152 C200.2@3620,2152.56 3670,2152.56 3675,2147.56 R200.2@3725,2147.56
NetC201_2: C201.2 L200.1 R200.1 R202.1 | length 468.3
  Top Layer w10: R202.1@3790,2017.44 3790,2017 3775,2017 3731,2061 3731,2109.16 3725,2115.16 R200.1@3725,2120 3905,2120 ; C201.2@3865,2048.78 3865,2080 3905,2120 ; 3905,2120 3913,2128 3930,2128 L200.1@3930,2127.44 3930,2120 3905,2120
NetC202_1: C202.1 C203.1 | length 168.9
  Top Layer w10: C203.1@3870,1891.22 3870,1891 3882,1891 3970,1979 C202.1@3970,2011.22
NetC202_2: C202.2 L200.2 L201.1 | length 246.1
  Top Layer w10: L200.2@3930,2155 3940,2155 ; C202.2@3970,2038.78 3970,2125 3940,2155 ; L201.1@4035,2125 3980,2125 3950,2155 3940,2155
NetC204_2: C204.2 L201.2 | length 257.1
  Top Layer w10: C204.2@4035,1925 4035,2025 4060,2050 4060,2142.56 4050,2152.56 L201.2@4035,2152.56
NetC205_1: C205.1 C206.1 L202.1 R207.1 | length 557.9
  Top Layer w10: R207.1@4085,1696.22 4085,1681 L202.1@4325,1681 ; C206.1@4250,1611.22 C205.1@4190,1611.22 4190,1611 4180,1611 4162,1629 4162,1650 4176,1664 4325,1664 L202.1@4325,1681 ; L202.1@4325,1681.22 L202.1@4325,1681
NetC207_1: C207.1 R213.1 | length 557.8
  Top Layer w10: C207.1@4300,1166.22 4300,1166 4287,1166 4275.5,1177.5 4275.5,1300 4299.5,1324 4470,1324 4495,1349 4495,1495 R213.1@4475,1495
NetC208_1: C208.1 R215.1 | length 674.6
  Top Layer w10: v1(4288,1439) 4288,1461 4329,1502 4370,1502 4408,1464 4453,1464 4471,1446 4471,1430 R215.1@4475,1430 ; v1(4338,1116) 4363.33,1141.33 C208.1@4363.33,1166.22
  Layer 1 w10: v1(4288,1439) 4282,1433 4282,1172 v1(4338,1116)
NetC209_1: C209.1 R216.1 | length 799.5
  Top Layer w10: C209.1@4426.67,1166.22 4426.67,1108.67 4362.53,1044.53 4277.47,1044.53 4255,1067 4255,1320 4341,1406 4445,1406 4471,1380 4471,1365 R216.1@4475,1365
NetC210_1: C210.1 R217.1 | length 181.2
  Top Layer w10: R217.1@4475,1300 4495,1300 4515,1280 4515,1180 4505,1170 4490,1170 C210.1@4490,1166.22
NetC212_1: C212.1
NetC212_2: C212.2
NetC650_1: C650.1 R653.1 | length 66.1
  Top Layer w10: R653.1@2615,3618.78 2615,3618 2623,3618 2645,3640 C650.1@2645,3666.22
NetC650_2: C650.2 IC5.12
NetC651_1: C651.1 IC1000.3 R653.2 | length 739.1
  Top Layer w10: C651.1@2585,3671.22 2585,3606 2600,3591 R653.2@2615,3591 ; R653.2@2615,3591.22 R653.2@2615,3591 ; v1(2652,3571) 2615,3571 R653.2@2615,3591 ; v1(3038,3495) 3110,3567 3137.4,3567 IC1000.3@3137.4,3600.79
  Layer 1 w10: v1(2652,3571) 2962,3571 v1(3038,3495)
NetC651_2: C651.2 IC5.9 | length 58.6
  Top Layer w10: IC5.9@2529.06,3705.16 2553,3705.16 2559.38,3698.78 C651.2@2585,3698.78
NetD6_2: D6.2 L18.1 Q1.1 Q1.2 Q1.5 Q1.6 | length 1079.4
  Top Layer w10: Q1.2@1810.79,3285 Q1.1@1810.79,3322.4 Q1.6@1909.21,3322.4 ; Q1.5@1909.21,3285 Q1.6@1909.21,3322.4 ; v1(2035,3169) 2055,3189 D6.2@2055,3243.39 2055,3290 2045,3300 2025.68,3300 2008,3282.32 1940,3282.32 1928,3294.32 1928,3322.4 Q1.6@1909.21,3322.4 ; L18.1@2325,3080.75 2450.75,3080.75 v1(2455,3085)
  Layer 1 w10: v1(2035,3169) 2119,3085 v1(2455,3085)
NetD?_1: D?.1 IC5.2 | length 53.6
  Top Layer w10: v1(1054.45,3395) D?.1@1108.07,3395
NetIC1_3: IC1.3 L2.2 | length 736.5
  Top Layer w10: L2.2@1723.78,3135 1745,3135 1770,3160 1770,3342.06 1772.94,3345 1920,3345 1937.32,3362.32 2108,3362.32 2187,3441.32 2187,3455.16 IC1.3@2212.91,3455.16
NetIC1_14: IC1.14 L1.2 | length 102.1
  Top Layer w10: L1.2@2143.78,3770 2157.55,3770 2209.55,3822 v1(2224.34,3822)
NetIC2_1: IC2.1 R11.1 | length 279.9
  Top Layer w10: IC2.1@1076.57,2919.8 1103,2919.8 1161.2,2978 1300,2978 1310,2988 R11.1@1310,3006.22
NetIC3_3: IC3.3 L13.2 | length 65.1
  Top Layer w10: L13.2@1055,3185 1083,3185 1088.16,3190.16 IC3.3@1117.91,3190.16
NetIC3_14: IC3.14 L8.2
NetIC4_1: IC4.1 R16.1 | length 93.3
  Top Layer w10: R16.1@2710,3746.22 2710,3706.79 2720.79,3696 IC4.1@2720.79,3657.4
NetIC5_3: IC5.3 R17.2 R19.1 | length 332
  Top Layer w10: R19.1@2215,3681.22 2215,3664 ; R17.2@2260,3628.78 2260,3633 2240,3633 2215,3658 2215,3664 ; IC5.3@2410.94,3724.84 2383,3724.84 2383,3677 2370,3664 2215,3664
NetIC7_1: IC7.1 R26.2 | length 75.8
  Top Layer w10: R26.2@1555,3391.22 1555,3356.22 IC7.1@1583.82,3327.4
NetIC8_3: IC8.3 R20.2 R24.2 | length 375.4
  Top Layer w10: IC8.3@1540.79,3492.6 1572.4,3492.6 1601,3464 1675,3464 1685,3474 1820,3474 R24.2@1820,3462.56 1820,3458.78 R20.2@1885,3458.78
NetIC9_1: IC9.1 IC9.4 R21.1 R22.1 | length 1130
  Top Layer w10: IC9.1@1370,3432.4 IC9.1@1372,3432.4 ; IC9.4@1468.43,3357.6 1448,3357.6 1448,3399.28 1414.88,3432.4 1400,3432.4 ; R21.1@1710,3426.22 1710,3430 1648,3430 1637.5,3440.5 1594.08,3440.5 1574.57,3460 1427.6,3460 ; R22.1@1715,3541.22 1715,3522 1619,3522 1601,3540 1601,3620 1566,3655 1500,3655 1443,3598 1443,3475.4 1427.6,3460 ; IC9.1@1372,3432.4 1372,3450 1382,3460 1427.6,3460 ; IC9.1@1372,3432.4 1400,3432.4 ; 1400,3432.4 1427.6,3460
NetIC10_2: IC10.2 R25.1 R28.2 | length 1012.5
  Top Layer w10: v1(1085,3675) v1(1085,3713) R25.1@1085,3846.22 ; IC10.2@1178.23,3675 v1(1238.27,3675) ; R28.2@1665,3665 v1(1665,3713)
  Layer 1 w10: v1(1085,3675) v1(1238.27,3675) ; v1(1085,3713) v1(1665,3713)
NetIC11_3: IC11.3 IC11.4 IC13.1 IC13.13 | length 2071.2
  Top Layer w10: IC13.1@2128.23,2445 2210,2445 2260,2395 IC13.13@2341.77,2395 2447,2395 v1(2502,2450) ; v1(2523,2950) 2600,2950 2627,2923 2627,2866 2731,2762 ; IC11.4@3068.23,2745 2935,2745 2912,2722 2731,2722 2731,2762 ; IC11.3@3068.23,2795 2893,2795 2870,2818 2731,2818 2731,2762
  Layer 2 w10: v1(2502,2450) 2458,2494 2458,2885 v1(2523,2950)
NetIC11_6: IC11.6 IC11.13 | length 416.8
  Top Layer w10: v1(3008,2645) IC11.6@3068.23,2645 ; v1(3222,2845) IC11.13@3281.77,2845
  Layer 2 w10: v1(3008,2645) 3208,2845 v1(3222,2845)
NetIC11_8: IC11.8 IC12.2 | length 1084.6
  Top Layer w10: v1(2498,2845) IC12.2@2558.23,2845 ; IC11.8@3281.77,2595 3322,2595 v1(3342,2575)
  Bottom Layer w10: v1(2498,2845) 2656,2687 3230,2687 v1(3342,2575)
NetIC11_12: IC11.12 IC12.5 IC12.6 IC13.11 | length 1616.4
  Top Layer w10: IC13.11@2341.77,2295 v1(2489,2295) ; v1(2418,2625) 2438,2645 IC12.6@2558.23,2645 IC12.5@2558.23,2695 2673,2695 2698,2670 2825,2670 2851,2696 2920,2696 2942,2718 3322,2718 3322,2795 IC11.12@3281.77,2795
  Layer 2 w10: v1(2418,2625) 2418,2468 2489,2397 v1(2489,2295)
NetIC12_3: IC12.3 IC13.3 | length 1000.5
  Top Layer w10: IC13.3@2128.23,2345 v1(2188,2345) ; IC12.3@2558.23,2795 v1(2618,2795)
  Bottom Layer w10: v1(2188,2345) 2188,2651 2435,2898 2515,2898 v1(2618,2795)
NetIC13_6: IC13.6 IC13.9 | length 213.5
  Top Layer w10: IC13.6@2128.23,2195 IC13.9@2341.77,2195
NetIC13_8: IC13.8 IC13.12 | length 398.6
  Top Layer w10: IC13.8@2341.77,2145 v1(2422,2145) ; IC13.12@2341.77,2345 v1(2449,2345)
  Layer 2 w10: v1(2422,2145) 2449,2172 v1(2449,2345)
NetIC17_3: IC17.3 R40.1 | length 2265.7
  Top Layer w10: IC17.3@1348.23,2455 v1(1449,2455) ; v1(3520,2428) R40.1@3520,2495
  Layer 1 w10: v1(1449,2455) 2139,2455 2185,2409 3501,2409 v1(3520,2428)
NetIC18_2: IC18.2 R41.2 R42.2 | length 511.2
  Top Layer w10: IC18.2@2823.23,3280 2793,3280 2783,3270 2783,3160 2795,3148 2820,3148 2840,3128 R41.2@2840,3098.78 2863.22,3122 3048.51,3122 3075,3095.51 R42.2@3075,3093.78
NetIC109_3: IC109.3 L120.2 | length 115.9
  Top Layer w10: L120.2@3511.22,3716.22 3511.22,3693 3559.84,3693 3567,3700.16 IC109.3@3600.94,3700.16
NetIC109_4: IC109.4 L124.1 | length 338.6
  Top Layer w10: L124.1@3275,3650 3496.53,3650 3527,3680.47 IC109.4@3600.94,3680.47
NetIC109_5: IC109.5 L122.1 | length 742.7
  Top Layer w10: v1(3591,3632) 3601,3642 3690,3642 3705,3657 3705,3680.47 IC109.5@3719.06,3680.47 ; L122.1@3737.5,3830 3737.5,3759.5 3742,3755 3840,3755 3864,3731 v1(3864,3632)
  Layer 1 w10: v1(3591,3632) v1(3864,3632)
NetIC109_6: IC109.6 L121.1 | length 341.8
  Top Layer w10: L121.1@3675,3830 3675,3834 3690,3834 3706,3850 3706,3860 3731,3885 3760,3885 3760,3700.16 IC109.6@3719.06,3700.16
NetIC110_5: IC110.5 IC111.5 | length 148.8
  Top Layer w10: IC111.5@3057.6,3789.41 3093,3824.81 3093,3858 3060.2,3890.8 IC110.5@3060.2,3910
NetIC112_5: IC112.5 L127.2 R138.1 | length 324.3
  Top Layer w10: v1(3920,2863) 3930,2853 3970,2853 R138.1@3970,2846.22 ; L127.2@4105,2760 v1(4105,2821)
  Layer 1 w10: v1(3920,2863) 3962,2821 v1(4105,2821)
NetIC112_6: IC112.6 L129.2 R138.2 | length 415.9
  Top Layer w10: L129.2@3735,2793.78 v1@3735,2865 ; v1(3744,2874) v1@3735,2865 ; v1(3744,2874.34) 3735,2865.34 v1@3735,2865 ; v1(3935,2954) 3970,2919 R138.2@3970,2873.78
  Layer 1 w10: v1(3744,2874) 3824,2954 v1(3935,2954)
NetIC113_2: IC113.2 L125.2 | length 80.9
  Top Layer w10: IC113.2@4405,3340 4426,3340 4452.22,3313.78 L125.2@4475,3313.78
NetIC114_3: IC114.3 L128.1 R150.2 | length 697.8
  Top Layer w10: R150.2@3882.56,3529.82 3879,3529.82 3879,3549.82 3807.45,3549.82 3788,3530.37 3693.37,3530.37 3683,3520 3683,3470 3695,3458 3721,3458 3728,3465 3819,3465 3865,3419 L128.1@3865,3403.78 3865,3397 3920,3397 3976,3341 3976,3320.16 IC114.3@4005.94,3320.16
NetIC114_4: IC114.4 L133.2 R146.2 | length 410
  Top Layer w10: R146.2@3878.78,3479.64 3891.64,3479.64 ; L133.2@3882.56,3580 3903,3580 3912,3571 3912,3500 3891.64,3479.64 ; IC114.4@4005.94,3300.47 3950,3300.47 3939,3311.47 3939,3440.64 3900,3479.64 3891.64,3479.64
NetIC114_5: IC114.5 L132.2 | length 69.8
  Top Layer w10: IC114.5@4124.06,3300.47 4148,3300.47 4163.47,3285 L132.2@4187.44,3285
NetIC114_6: IC114.6 L130.1
NetIC115_1: IC115.1 R141.2 R145.1 | length 1431.9
  Top Layer w10: R141.2@3975,2650 R141.2@3975,2653 ; IC115.1@4010,2498.82 3979,2498.82 3979,2570 3995,2586 3995,2640 3982,2653 R141.2@3975,2653 ; R145.1@4118.78,2485 4167,2485 4184.42,2502.42 4216.58,2502.42 4244.17,2530 4521,2530 4521,2603 4510,2614 4400,2614 4380,2634 4380,2738 4300,2738 4285,2723 4285,2692 3989,2692 3975,2678 R141.2@3975,2653
NetIC115_3: IC115.3 R144.1 R149.2 | length 623.5
  Top Layer w10: R149.2@3983.78,2430 4016,2430 4071,2485 4071,2500 4085,2514 4110,2514 4122.56,2526.56 R144.1@4122.56,2535 4137,2535 4172,2570 4172,2641 4144,2669 4015,2669 4015,2550 IC115.3@4010,2550
NetIC115_4: IC115.4 R143.2 R148.1 R149.1 | length 372.2
  Top Layer w10: R148.1@3860,2460 3860,2456 3917,2456 v1(3918,2455) 3920,2455 3945,2430 R149.1@3956.22,2430 ; R143.2@3860,2597.56 3860,2598 v1(3900,2598) 3922,2576 3922,2550 IC115.4@3935.2,2550
  Layer 1 w10: v1(3900,2598) 3918,2580 v1(3918,2455)
NetIC200_1: R219.2 R220.1 | length 436.1
  Top Layer w10: R219.2@3546,1193.78 3546,1210 3665,1210 3710,1165 3710,1045 3700,1035 3619,1035 3614,1040 R220.1@3614,1055
NetIC200_2: R222.2 R223.2 | length 268.1
  Top Layer w10: R222.2@3546,1083.78 3546,1100 3633,1187 3640,1187 3682,1145 R223.2@3682,1082.56
NetIC200_4: R214.1
NetIC200_5: R209.2 R210.1 | length 415.9
  Top Layer w10: R209.2@3528.75,1313.78 3528.75,1317 3477,1368.75 3477,1465 3519.5,1507.5 3544.5,1507.5 3572,1480 3572,1400 3587,1385 R210.1@3605,1385
NetIC200_7: R206.2
NetIC200_8: R209.1 R211.2 | length 88.8
  Top Layer w10: R211.2@3452.5,1313.78 3452.5,1311.89 3477.89,1311.89 3503.56,1286.22 R209.1@3528.75,1286.22
NetIC201_1: R207.2
NetIC201_8: R210.2
NetIC201_9: R214.2
NetIC201_10: 
NetIC900_1: IC900.1 R203.1 R204.1 R205.2 | length 333
  Top Layer w10: R203.1@3280,2140 3315,2140 3318.78,2136.22 R204.1@3355,2136.22 3355,2113 3340,2098 ; R205.2@3320,2062.56 3320,2078 3340,2098 ; IC900.1@3471.28,2055.39 3472,2055.39 3472,2086 3460,2098 3340,2098
NetL15_2: L15.2 R11.2 | length 1694.6
  Top Layer w10: v1(1269,3269) 1284,3254 1284,3185 1300,3169 1300,3055 1310,3045 R11.2@1310,3033.78 ; L15.2@2585,3352.56 v1(2585,3403)
  Bottom Layer w10: v1(1269,3269) 1278,3260 1515,3260 1533,3278 1892.32,3278 1908,3262.32 2069.32,3262.32 2174,3367 2549,3367 v1(2585,3403)
NetL17_1: L17.1 R16.2 | length 61.4
  Top Layer w10: L17.1@2660,3746.22 2671,3746.22 2698.56,3773.78 R16.2@2710,3773.78
NetL130_2: L130.2
NetL132_1: L132.1
NetR132_2: R132.2
NetR136_1: R136.1
NetR136_2: R136.2 Y102.3 | length 130.3
  Top Layer w10: R136.2@4215,2913.78 4271,2913.78 4283.95,2900.83 Y102.3@4339.96,2900.83
NetR139_1: R139.1
NetR139_2: R139.2 Y103.3 | length 139.5
  Top Layer w10: R139.2@4210,2478.78 4263,2478.78 4285.95,2455.83 Y103.3@4339.96,2455.83
NetR146_1: R146.1 R147.1 | length 154.9
  Top Layer w10: R147.1@3705,3478.5 3705,3485 3829.74,3485 3835.1,3479.64 R146.1@3851.22,3479.64
NetR147_2: R147.2 R150.1 | length 165.6
  Top Layer w10: R147.2@3705,3506.06 3831.6,3506.06 3845.53,3520 3845.53,3529.82 R150.1@3855,3529.82
NetR208_2: R208.2 R211.1 R212.1 | length 244.1
  Top Layer w10: R208.2@3300,1408.78 3300,1405 3311,1405 3356,1360 3356,1294 3363.78,1286.22 R212.1@3376.25,1286.22 R211.1@3452.5,1286.22
NetR218_2: R218.2 R219.1 R221.2 | length 473.1
  Top Layer w10: v1(3332,1219) 3410,1141 R218.2@3410,1082.56 R221.2@3478,1082.56 ; v1(3487,1219) 3539,1167 3546,1167 R219.1@3546,1166.22
  Layer 1 w10: v1(3332,1219) v1(3487,1219)
PAEn_N: IC12.13 IC17.4 | length 2060.6
  Top Layer w10: v1(1248,2405) IC17.4@1348.23,2405 ; v1(2692,2885) 2732,2845 IC12.13@2771.77,2845
  Layer 1 w10: v1(1248,2405) 1248,2598 1364,2714 1364,2820 1388,2844 1524.38,2844 1580,2788.38 2361.38,2788.38 2458,2885 v1(2692,2885)
PAEn_P: IC6.4 IC10.5 IC11.11 IC12.11 IC12.12 IC110.4 | length 4938.9
  Top Layer w10: IC10.5@1391.77,3575 1253,3575 1208,3530 1208,3370 1231,3347 1283,3347 1310.5,3319.5 1310.5,3197.5 1320,3188 1405,3188 1417,3200 1417,3209.41 IC6.4@1437.4,3209.41 1437.4,3147.6 v1(1463,3122) ; IC12.12@2771.77,2795 IC12.11@2771.77,2745 2892,2745 2915,2768 3164,2768 3187,2745 3236,2745 ; v1(2967,3475) 2967,3597 ; IC110.4@3060.2,3961.18 3008.18,3961.18 2967,3920 2967,3597 ; IC11.11@3281.77,2745 3236,2745 ; 2967,3597 2720,3350 2720,3087 2889,2918 3120,2918 3181,2857 3181,2800 3236,2745
  Layer 1 w10: v1(1463,3122) 1483,3142 1882,3142 2215,3475 v1(2967,3475)
PB_ENABLE: J1.47 J2.47 R35.1 | length 96.3
  Top Layer w10: R35.1@1990,2096.22 1990,2075.45 2028,2037.45 v1(2028,2015.66)
RX/TX_CNTL: J1.45 J2.45 R34.1 | length 941.8
  Top Layer w10: J1.45@2375.59,1649.96 2521,1649.96 2534.15,1663.11 J2.45@2680,1663.11 2719,1663.11 2719,1880 2663,1936 2520,1936 2460,1996 R34.1@2460,2065
SENSOR_PWR: C60.1 C61.2 IC15.2 IC16.4 J1.51 J2.51 | length 3053.1
  Top Layer w10: IC15.2@1370.79,1680 1347,1680 1337,1690 1337,1756 1501,1920 1501,1987.6 ; IC16.4@1474.21,1987.6 1501,1987.6 ; v1(1719.58,1769.02) 1501,1987.6 ; C60.1@2007.76,2550.87 2000,2550 1840,2710 1811,2710 1781,2680 1781,2131 1637.6,1987.6 1501,1987.6 ; v1(2318,1840) 2318,1720 2328.98,1709.02 J1.51@2375.59,1709.02 2521,1709.02 2534.15,1722.16 J2.51@2680,1722.16
  Layer 1 w10: v1(1719.58,1769.02) 2247.02,1769.02 v1(2318,1840)
SPI1_MISO: J1.3 J2.3 R213.2 | length 2350.4
  Top Layer w10: J1.3@2375.59,1236.58 2521,1236.58 2534.15,1249.72 J2.3@2680,1249.72 2720,1249.72 2758,1287.72 v1(2758,1512) ; v1(4289,1542) 4388.21,1542 4435.21,1495 R213.2@4447.44,1495
  Layer 1 w10: v1(2758,1512) 2789.47,1543.47 4287.53,1543.47 v1(4289,1542)
SPI1_MOSI: J1.4 J2.4 R215.2 | length 2773.5
  Top Layer w10: v1(2052.26,1190) 2098.84,1236.58 J1.4@2150,1236.58 ; J2.4@2922.99,1249.72 2958.34,1249.72 v1@3018.06,1203 ; v1(3018.06,1190) v1@3018.06,1203 ; v1(3105,1203) v1@3018.06,1203 ; v1(4348,1462) 4380,1430 R215.2@4447.44,1430
  Layer 1 w10: v1(2052.26,1190) v1(3018.06,1190) ; v1(3105,1203) 3384,1482 4328,1482 v1(4348,1462)
SPI1_SCLK: J1.2 J2.2 R216.2 | length 61
  Top Layer w10: v1(4386.88,1364) 4387.88,1365 R216.2@4447.44,1365
SPI1_SS: J1.46 J2.46 R217.2 | length 1794.4
  Top Layer w10: J2.46@2922.99,1663.11 3022.89,1663.11 ; v1(3101.54,1604.37) 3081.63,1604.37 3022.89,1663.11 ; v1(3102,1644) 3082.89,1663.11 3022.89,1663.11 ; v1(4322,1280) 4342,1300 R217.2@4447.44,1300
  Bottom Layer w10: v1(3102,1644) 3115.61,1644 3210.61,1549 4053,1549 v1(4322,1280)
TLM: IC12.1
TLM_DATA: J1.38 J2.38 R218.1 | length 1076.4
  Top Layer w10: v1(2884,1105) 2884,1584.37 J2.38@2922.99,1584.37 ; v1(3343,1067) 3363,1047 3410,1047 R218.1@3410,1055
  Layer 1 w10: v1(2884,1105) 3305,1105 v1(3343,1067)
TLM_ENABLE: J1.52 J2.52 R31.1 | length 2532.6
  Top Layer w10: v1(2061.98,1729.02) 2081.98,1709.02 J1.52@2150,1709.02 ; J2.52@2922.99,1722.16 2994.94,1722.16 3001.79,1729.02 v1(3001.79,1803) ; R31.1@2980,2365 2980,2350 v1(3040,2290)
  Layer 1 w10: v1(2061.98,1729.02) 2927.81,1729.02 v1(3001.79,1803)
  Layer 2 w10: v1(2061.98,1729.02) 2479.02,1729.02 v1(3040,2290)
TX_PA_CURRENT: C52.1 J1.33 J2.33 R38.1 | length 3905.2
  Top Layer w10: R38.1@1402.76,2260.87 1402.76,2223.24 v1(1404,2222) ; v1(2223,1974.71) 2223,1540 2246,1517 2286.15,1517 2301,1531.85 J1.33@2375.59,1531.85 2528,1531.85 2541.15,1545 J2.33@2680,1545 ; v1(3136,1503) 3220.91,1587.91 3220.91,1861.75 3207.76,1874.9 C52.1@3207.76,2035.87
  Bottom Layer w10: v1(1404,2222) 1975.71,2222 ; v1(2223,1974.71) 1975.71,2222 ; v1(3136,1503) 2996,1503 2277,2222 1975.71,2222
TX_PWR_FWD: J1.48 J2.48 R21.2 R144.2 | length 6921.3
  Top Layer w10: v1(1669,3390) 1704,3390 1734,3420 1734,3440 R21.2@1710,3453.78 ; v1(1970,1663) 1976.65,1669.65 v1@1986.35,1669.65 ; v1(1970,1686) v1@1986.35,1669.65 ; v1(1981,1712) 2023.35,1669.65 ; J1.48@2150,1669.65 2023.35,1669.65 ; J2.48@2922.99,1682.79 3038.79,1682.79 v1(3050,1694) ; R144.2@4095,2535 4099.08,2535 4099.08,2569.08 4120,2590 v1(4127,2590) ; v1@1986.35,1669.65 2023.35,1669.65
  Layer 1 w10: v1(1970,1663) 2928,1663 2951,1686 ; v1(1970,1686) 2951,1686 ; v1(3050,1694) 3042,1686 2951,1686 ; v1(4127,2590) 4266,2451 4266,2049 4092,1875 3140,1875 2951,1686
  Layer 2 w10: v1(1669,3390) 1704,3425 1862.21,3425 1923.21,3364 2066.32,3364 2141,3289.32 2141,2776 1981,2616 v1(1981,1712)
TX_PWR_RFLT: IC5.5 J1.58 J2.58 | length 1307.4
  Top Layer w10: v1(2034.6,1834.32) 2095,1773.93 ; v1(2068,1863) 2095,1836 2095,1773.93 ; J1.58@2150,1768.07 2100.85,1768.07 ; J2.58@2922.99,1781.22 2961.79,1781.22 v1(2961.79,1890) ; 2095,1773.93 2100.85,1768.07 ; 2095,1773.93 2095,1768.07 2100.85,1768.07
  Layer 1 w10: v1(2068,1863) 2209,1863 2236,1890 v1(2961.79,1890)
TX_TEMP: C53.1 J1.34 J2.34 R37.1 | length 2770.8
  Top Layer w10: R37.1@1640,1656.22 v1(1640,1576) 1640.34,1575.66 v1(1716,1575.66) ; J2.34@2922.99,1545 2957,1545 3021,1544 ; v1(3122,1444) 3021,1544 ; C53.1@3207.76,2185.87 3207.76,2145 3128,2065.24 3128,1813.86 3200.91,1740.95 3200.91,1624.91 3120,1544 3021,1544
  Bottom Layer w10: v1(1640,1576) 1938,1576 2070,1444 v1(3122,1444)
Vbatt: C48.1 C49.1 C63.1 C64.1 IC10.8 IC17.1 | length 4398.1
  Top Layer w10: v1(1198,2555) v1(1288,2555) IC17.1@1348.23,2555 ; v1(1338,3753) 1338,3747 1360,3725 IC10.8@1375,3725 ; IC10.8@1391.77,3725 IC10.8@1375,3725 ; C48.1@1480,3815 C49.1@1375,3815 IC10.8@1375,3725 ; v1(3635,2457) C63.1@3635,2500 3645,2490 C64.1@3740,2490
  Layer 1 w10: v1(1288,2555) 1428,2695 3397,2695 v1(3635,2457)
  Layer 2 w10: v1(1198,2555) 1180,2573 1180,3693 1240,3753 v1(1338,3753)
VccPA: C19.1 C40.1 C42.1 L7.2 L12.1 L19.2 R1.1 R8.1 | length 6221.7
  Top Layer w10: L12.1@1120,3936.22 1120,3921 1130,3911 v1(1169,3911) ; C19.1@1375,3896.22 1375,3886 1410,3886 v1(1413,3883) ; v1(1437,3775) 1477,3735 1477,3720 R8.1@1496.22,3720 ; C42.1@1900,3116.22 1900,3096.5 1920,3076.5 L19.2@2045,3076.5 L19.2@2127.32,3076.5 ; L7.2@1953.78,3770 R1.1@2016.22,3770 2016.22,3781.22 ; 2018.22,3783.22 2016.22,3781.22 ; C40.1@2280,3306.22 2280,3303.71 2231.29,3255 2164,3255 2127.32,3218.32 L19.2@2127.32,3076.5 ; v1(2720,3974) 2205,3974 2182,3951 ; 2016.22,3781.22 2018.2,3783.24 ; 2018.2,3783.24 2182,3951 ; 2018.2,3783.24 2016.22,3785.22 2182,3951 ; L19.2@2127.32,3076.5 2165.5,3076.5 2230,3012 2673,3012 2700,3039 2700,3411 2853,3564 2853,3682 2738,3797 2738,3890 2679,3949 2182,3951
  Layer 1 w10: v1(1169,3911) 1247,3833 1379,3833 v1(1437,3775) ; v1(1413,3883) 1398,3868 1272,3868 1240,3900 1240,3940 1280,3980 2031,3980 2037,3974 v1(2720,3974)
  Layer 2 w10: v1(1413,3883) 1437,3859 v1(1437,3775)
VGA_CTRL: J1.36 J2.36 R148.2 | length 3134.9
  Top Layer w10: v1(1955.32,1472.8) v1@1967.52,1485 ; v1(1967,1485) v1@1967.52,1485 ; J1.36@2150,1551.54 2094.54,1551.54 2028,1485 v1@1967.52,1485 ; v1(3820,2354) 3860,2394 R148.2@3860,2432.44
  Bottom Layer w10: v1(1967,1485) 2048,1404 3140,1404 3176,1440 3176,1520 3152.53,1543.47 3017.53,1543.47 3001,1560 3001,1742.05 3391.08,2132.13 3391.08,2180.75 3564.33,2354 v1(3820,2354)
VPA: C36.1 C37.1 C66.1 IC7.4 IC7.5 IC7.6 IC16.5 Q1.3 Q1.4 R18.1 R18.2 R39.2 | length 6847.8
  Top Layer w10: IC16.5@1474.21,2062.4 1506,2062.4 1507.6,2064 ; v1(1507.6,2124) 1507.6,2064 ; v1(1621,2177.4) 1507.6,2064 ; IC7.6@1686.18,3327.4 IC7.5@1686.18,3290 IC7.4@1686.18,3252.6 1715,3252.6 ; v1(1715,3197) 1715,3252.6 ; v1(1728,3210) 1728,3240 1715.4,3252.6 1715,3252.6 ; C37.1@1875,3546.22 R18.1@1925,3546.22 ; Q1.4@1909.21,3247.6 1875.6,3247.6 ; C36.1@1920,3641.22 1920,3610 1925,3605 R18.2@1925,3573.78 R18.1@1925,3546.22 ; v1(1926,3455) 1925,3456 R18.1@1925,3546.22 ; v1(4196,2160) 4255,2160 4275,2140 R39.2@4275,2118.78 4336,2118.78 4357.34,2097.44 C66.1@4420,2097.44 ; 1875.6,3247.6 Q1.3@1810.79,3247.6 1810,3247.6 v1(1810,3182) 1875.6,3247.6
  Layer 1 w10: v1(1507.6,2124) 1546.6,2085 3607.98,2085 3657.83,2035.16 3725,2035.16 3849.84,2160 v1(4196,2160)
  Layer 2 w10: v1(1621,2177.4) 1621,2765.09 1566.09,2820 1566.09,2938.09 1637.58,3009.58 1637.58,3076.58 1743,3182 1756,3182 ; v1(1728,3210) 1756,3182 ; v1(1810,3182) 1756,3182
  Bottom Layer w10: v1(1715,3197) 1676,3158 1579,3158 1466,3045 1301,3045 1180,3166 1180,3332 1200,3352 1573,3352 1580,3345 1861,3345 1926,3410 v1(1926,3455)
pads on no net: C215.2 IC1.1 IC1.4 IC1.5 IC1.7 IC1.8 IC1.11 IC1.15 IC1.17 IC3.1 IC3.4 IC3.5 IC3.7 IC3.8 IC3.11 IC3.15 IC3.17 IC6.1 IC10.4 IC11.14 IC12.10 IC13.14 IC14.3 IC15.4 IC17.2 IC17.7 IC18.4 IC109.2 IC109.9 IC110.1 IC111.3 IC900.2 IC900.5 IC1000.1 IC1000.2 IC1000.5 J1.1 J1.5 J1.6 J1.7 J1.8 J1.9 J1.10 J1.11 J1.12 J1.13 J1.14 J1.15 J1.16 J1.21 J1.23 J1.25 J1.26 J1.27 J1.28 J1.29 J1.30 J1.31 J1.32 J1.35 J1.39 J1.50 J1.54 J1.55 J1.56 J1.57 J1.59 J1.60 J1.MH1 J1.MH2 J1.MP1 J1.MP2 J1.MP3 J1.MP4 J2.1 J2.5 J2.6 J2.7 J2.8 J2.9 J2.10 J2.11 J2.12 J2.13 J2.14 J2.15 J2.16 J2.21 J2.23 J2.25 J2.26 J2.27 J2.28 J2.29 J2.30 J2.31 J2.32 J2.35 J2.39 J2.50 J2.54 J2.55 J2.56 J2.57 J2.59 J2.60 J2.61 J2.62 J2.63 J2.64 J?.6 J?.7 J?.8 J?.9 J?.10 J?.MH1 J?.MH2 R220.2 Y100.5 Y101.5 Y102.4 Y102.5 Y103.5
copper on no net: | length 5962.3
  Top Layer w10: 1815,2685 1815,1020 1825,1030 3239.14,1030 3245,1035.86 3245,2484.14 3239.14,2490 1835,2490

## Polygon pours and split planes (outlines as drawn)
no net on GND (split plane): 4529.9,3994.9 4529.9,1020.1 1020.1,1020.1 1020.1,3994.9